# Altium PCB Board_V0.PcbDoc
Units mil, origin at the board's own origin, x right, y up, seen from the top; angles counter-clockwise.
Board outline 6000 x 4000 mil, 2 copper layers (Top Layer, Bottom Layer); 6 components, 7 nets, 16 pads, 0 vias.
Unrouted connection lines stored in the file: 9.
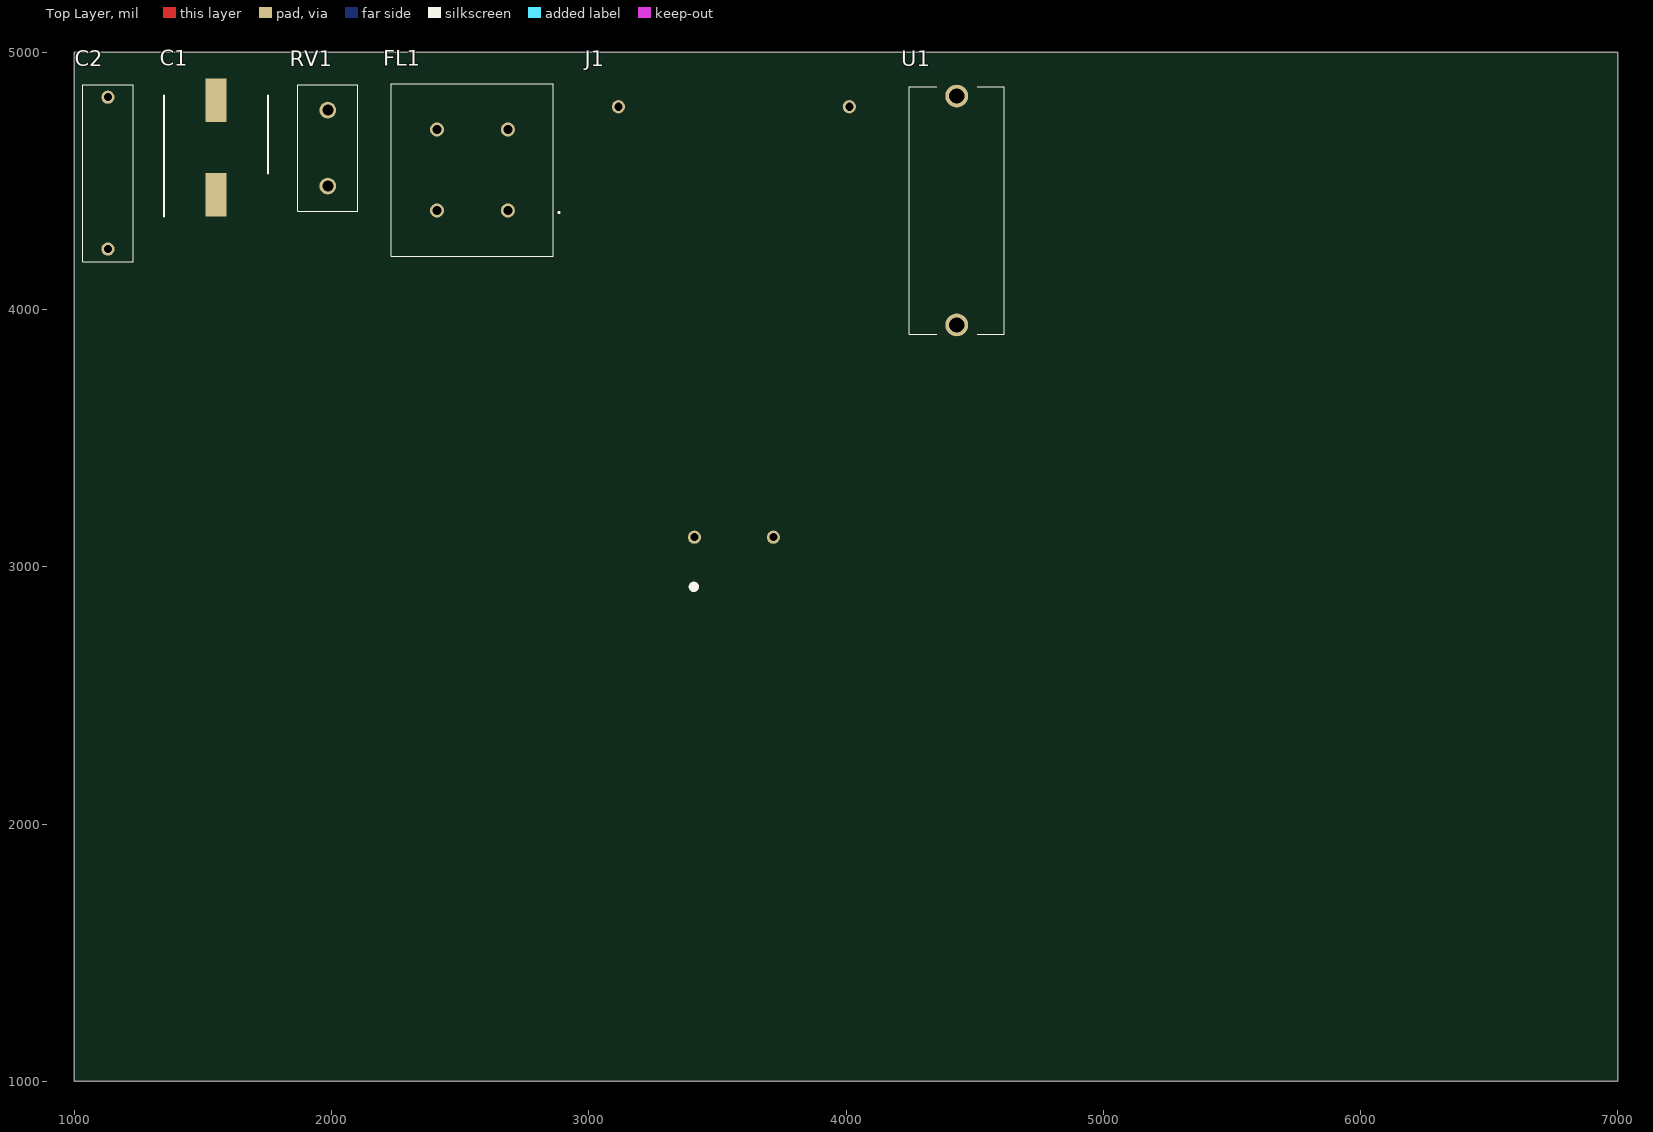
[diagram p0: Top Layer view]
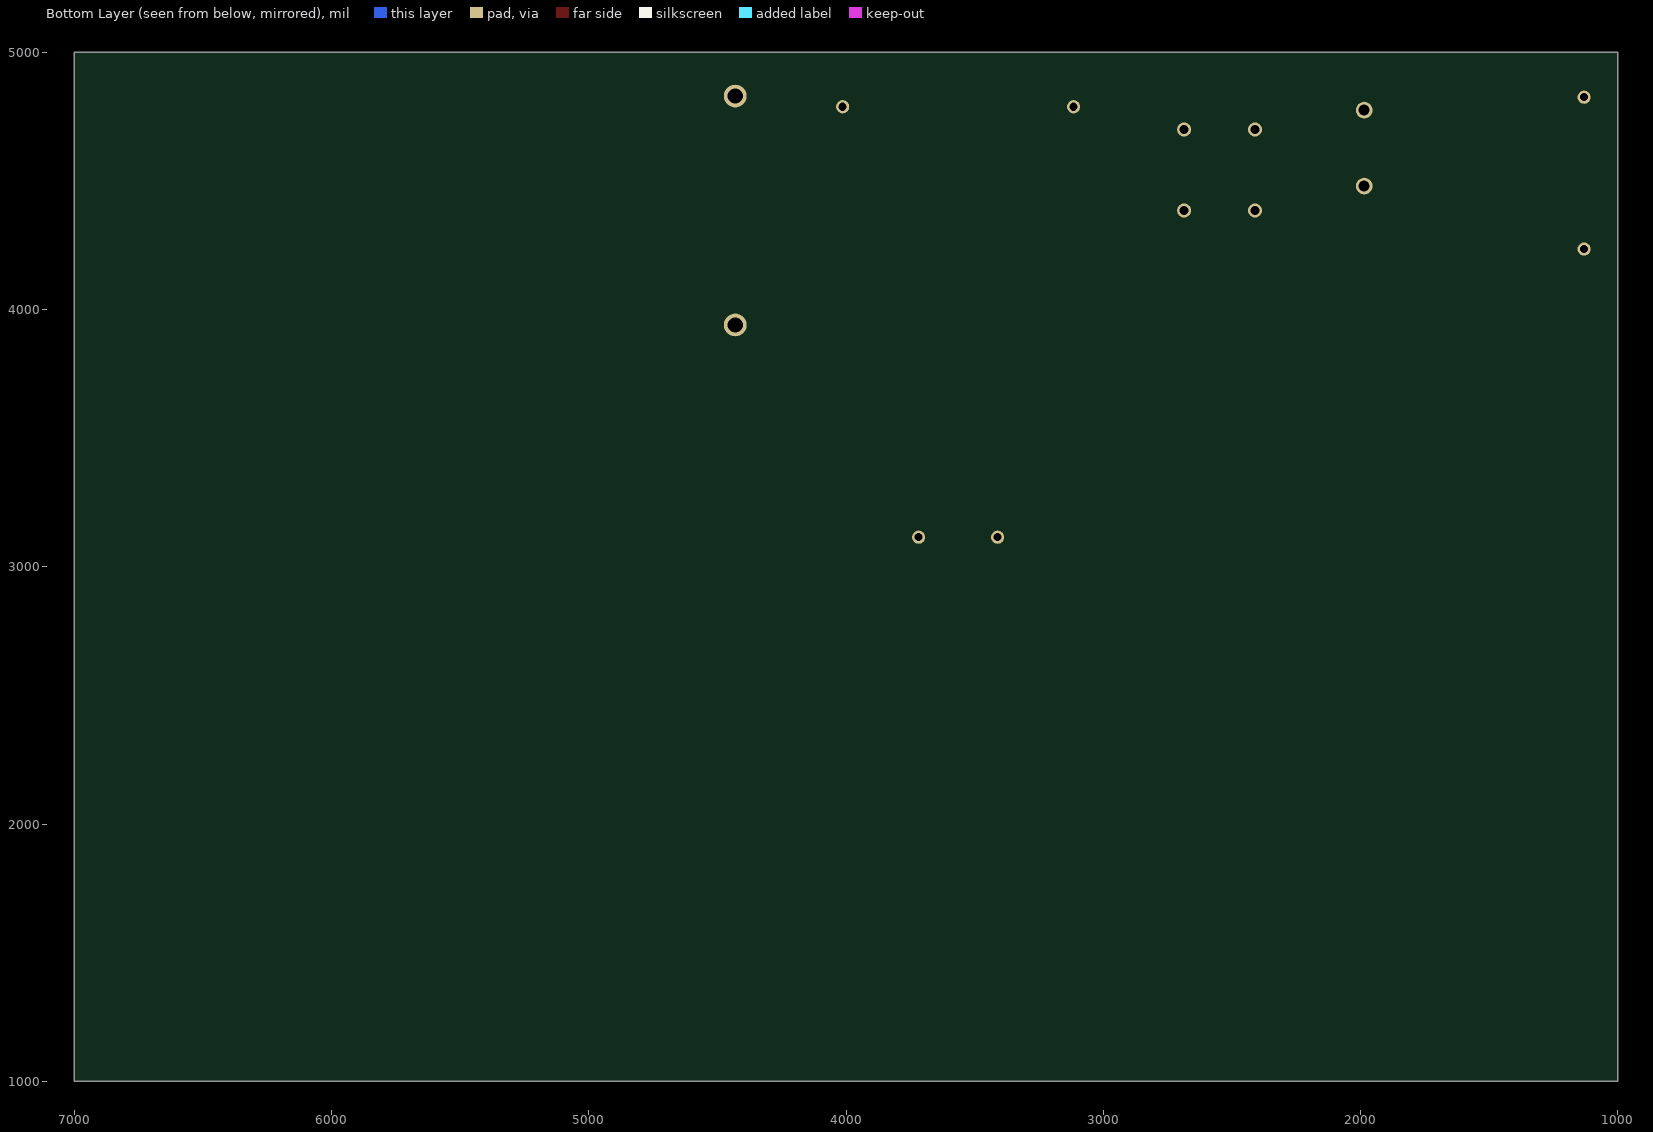
[diagram p1: Bottom Layer view, seen from below]

## Layer stack, top to bottom
Top Solder: solder mask 0.4, Solder Resist, Dk 3.5
Top Layer: signal copper 1.4
Dielectric 1: dielectric 12.6, FR-4, Dk 4.8
Bottom Layer: signal copper 1.4
Bottom Solder: solder mask 0.4, Solder Resist, Dk 3.5

## Board outline
1000,1000 7000,1000 7000,5000 1000,5000

## Design rules (kind name [scope] priority, off if disabled: settings)
Clearance [All] p1: gap=10 ignorepadtopadclearanceinfootprint=FALSE except(0: Arc-Hole Track-Hole SMDPad-Hole THPad-Hole Via-Hole Fill-Hole Poly-Hole Region-Hole Text-Hole)
PolygonConnect [All] p1: connectstyle=Relief reliefconductorwidth=10 reliefentries=4 polygonreliefangle="90 Angle" airgapwidth=10
RoomDefinition power_input [InComponentClass('power_input')] p1: confinementstyle=ConfineIn formatcopy=TRUE lockcomponents=FALSE outline 985.59,2865 4665.59,2865 4665.59,5025 985.59,5025
RoutingVias [All] p1: holewidth=28 width=50 viastyle="Through Hole" minholewidth=28 minwidth=50 maxholewidth=28 maxwidth=50
SolderMaskExpansion [All] p1: expansion=4 istentingtop=FALSE
Width [All] p1: maxlimit=10 minlimit=10 preferedwidth=10
30 further rules are at their usual default settings.

## Components (designator, comment, footprint, x,y, rotation, side; value= is the part's Value field where it differs from the comment)
C1 "EEEFC1E221AP" CAPAE1030X1050N 1550.59,4630 r90 top
C2 "ECQ-UAAF104M" ECQUAAF104M 1130.59,4235 r90 top
FL1 "UU9.8Y-10MH" UU98Y10MH 2685.59,4385 r0 top
J1 "HLK-10M12" HLK10M12 3410.59,3115 r90 top
RV1 "MOV-10D561K" MOV10D561K 1985.59,4480 r90 top
U1 "0PTF0078P" 0PTF0078P 4430.59,4385 r90 top

## Footprints (in the part's own frame and the unit in brackets; to place one, negate y for a bottom-side part, rotate by r counter-clockwise, add the part's x,y. Pads: shape width x height; smd on the part's side, far side on the other; paste and mask are expansions set on the pad)
0PTF0078P [mm]
  round 2.25 hole 1.5: 1(-11.3,0) 2(11.3,0)
  silkscreen extent -12.2,-4.7 12.2,4.7, body extent -12.2,-4.7 12.2,4.7, height 11.6
CAPAE1030X1050N [mm]
  rect 4.3x2.1 smd: 1(-4.65,0) 2(4.65,0)
  silkscreen extent -6.8,-5.15 5.15,5.15, body extent -6,-5.25 6,5.25, height 10.5
ECQUAAF104M [mm]
  round 1.3 hole 0.8: 1(0,0) 2(15,0)
  silkscreen extent -1.25,-2.5 16.25,2.5, body extent -1.25,-2.5 16.25,2.5, height 12.6
HLK10M12 [mm]
  round 1.3 hole 0.8: 1(0,0) 2(0,-7.8) 3(42.5,7.5) 4(42.5,-15.3)
  silkscreen extent -5.06,-0.11 -4.74,0.21, body extent -2.2,-17.8 44.7,10, height 21.9
MOV10D561K [mm]
  round 1.65 hole 1.1: 1(0,0) 2(7.5,0)
  silkscreen extent -2.5,-2.95 10,2.95, body extent -2.5,-2.95 10,2.95, height 15.6
UU98Y10MH [mm]
  round 1.4 hole 0.9: 1(0,0) 2(-7,0) 3(-7,8) 4(0,8)
  silkscreen extent -11.5,-4.5 5.1,12.5, body extent -11.5,-4.5 4.5,12.5, height 14.1

## Part data
C1: "Capacitor Polarised", Manufacturer_Name=Panasonic, Arrow Part Number=EEEFC1E221AP, Datasheet Link=https://www.arrow.com/en/products/eee-fc1e221ap/panasonic, Height=10.5mm, Manufacturer_Part_Number=EEEFC1E221AP
C2: "Capacitor", Manufacturer_Name=Panasonic, Mouser Part Number=667-ECQ-UAAF104M, Arrow Part Number=ECQ-UAAF104M, Arrow Price/Stock=https://www.arrow.com/en/products/ecquaaf104m/panasonic, Datasheet Link=https://industrial.panasonic.com/cdbs/www-data/pdf/RDI0000/ABD0000C249.pdf, Height=12.5mm, Manufacturer_Part_Number=ECQ-UAAF104M, Mouser Price/Stock=https://www.mouser.co.uk/ProductDetail/Panasonic/ECQ-UAAF104M?qs=C7H2C2ytqFWtOclI%252BvtUwQ%3D%3D
FL1: "Filter", Manufacturer_Name="Guangdong Fenghua Advanced Tech", Arrow Part Number=UU9.8Y-10MH, Datasheet Link=https://datasheet.lcsc.com/szlcsc/Guangdong-Fenghua-Advanced-Tech-UU9-8Y-10mH_C75192.pdf, Height=14mm, Manufacturer_Part_Number=UU9.8Y-10MH
J1: "Connector", Manufacturer_Name=Hi-Link, Arrow Part Number=HLK-10M12, Datasheet Link=https://datasheet.lcsc.com/szlcsc/1909111105_HI-LINK-HLK-10M12_C403746.pdf, Height=21.8mm, Manufacturer_Part_Number=HLK-10M12
RV1: "Varistor", Manufacturer_Name=Bourns, Mouser Part Number=652-MOV-10D561K, Arrow Part Number=MOV-10D561K, Arrow Price/Stock=https://www.arrow.com/en/products/mov-10d561k/bourns, Datasheet Link=https://www.bourns.com/docs/Product-Datasheets/MOV10D.pdf, Height=15.5mm, Manufacturer_Part_Number=MOV-10D561K, Mouser Price/Stock=https://www.mouser.co.uk/ProductDetail/Bourns/MOV-10D561K?qs=lgttKnAd%252B2ArrqGQgWwr6w%3D%3D
U1: "Undefined or Miscellaneous", Manufacturer_Name=LITTELFUSE, Mouser Part Number=576-0PTF0078P, Arrow Part Number=0PTF0078P, Arrow Price/Stock=https://www.arrow.com/en/products/0ptf0078p/littelfuse, Datasheet Link=https://media.digikey.com/pdf/Data%20Sheets/Littelfuse%20PDFs/PTF075_77_78.pdf, Height=11.5mm, Manufacturer_Part_Number=0PTF0078P, Mouser Price/Stock=https://www.mouser.co.uk/ProductDetail/Littelfuse/0PTF0078P?qs=Co4VkB5J4%2Fsczy6gG8s%2FsA%3D%3D

## Nets (pads, with @x,y where several pads share a name; then routed paths per layer and width w, separated by ;. In a path a pad name is that pad's centre, name@x,y a point inside that pad or via, vN(x,y) a via of type N, cw(c..) or ccw(c..) an arc to the next point about the centre after c; other vN are vias at no path point)
12V: C1.1 J1.4
GND: C1.2 J1.3
NetC2_1: C2.1 FL1.2 RV1.1
NetC2_2: C2.2 FL1.3 RV1.2 U1.2
NetFL1_1: FL1.1 J1.2
NetFL1_4: FL1.4 J1.1
NetU1_1: U1.1